# Altium PCB For_Atmega328P.PcbDoc
Units mm, origin at the board's own origin, x right, y up, seen from the top; angles counter-clockwise.
Board outline 18 x 44 mm, 2 copper layers (Top Layer, Bottom Layer); 16 components, 14 nets, 42 pads, 7 vias.
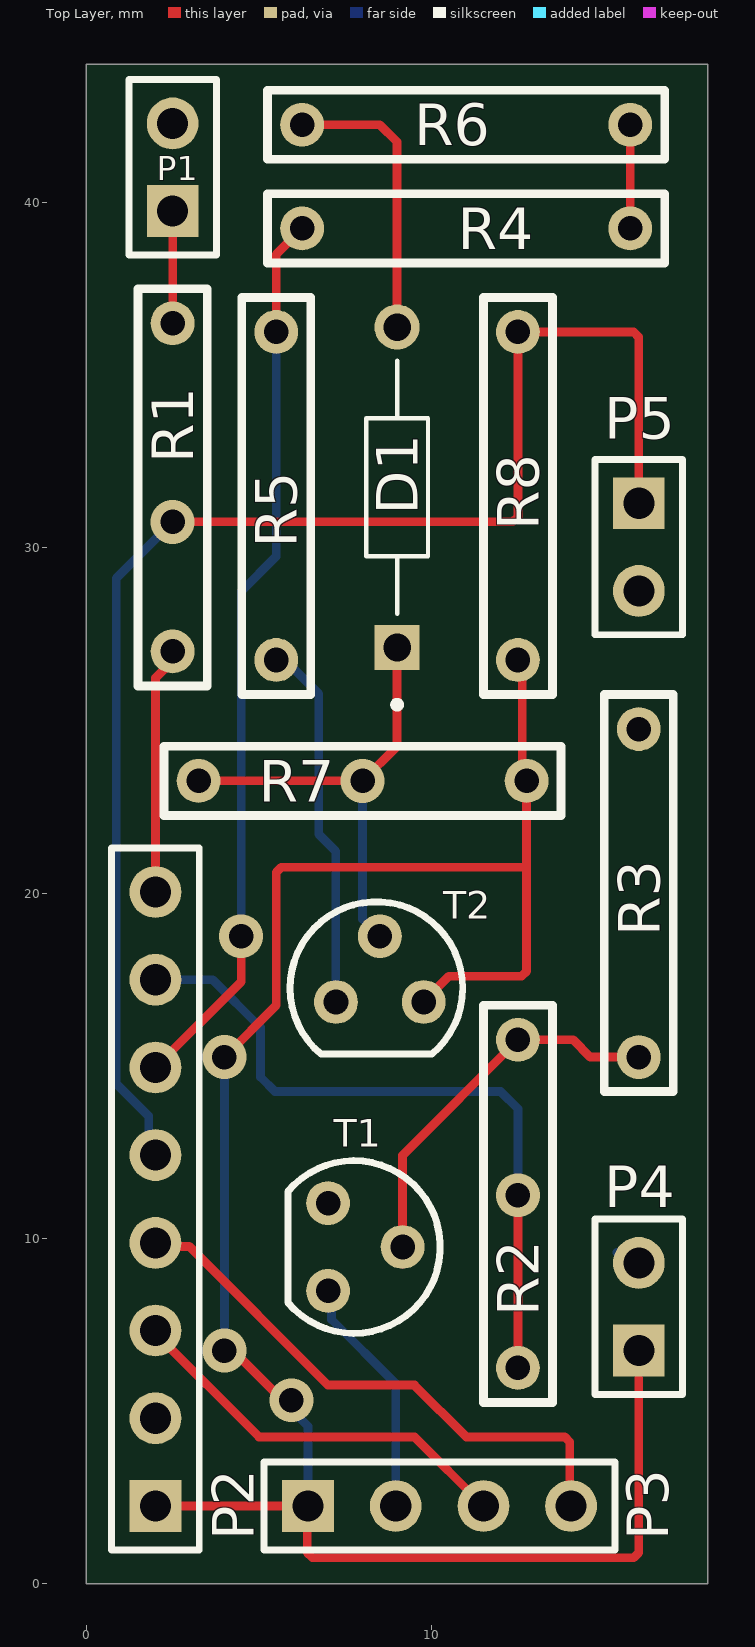
[diagram p0: Top Layer view]
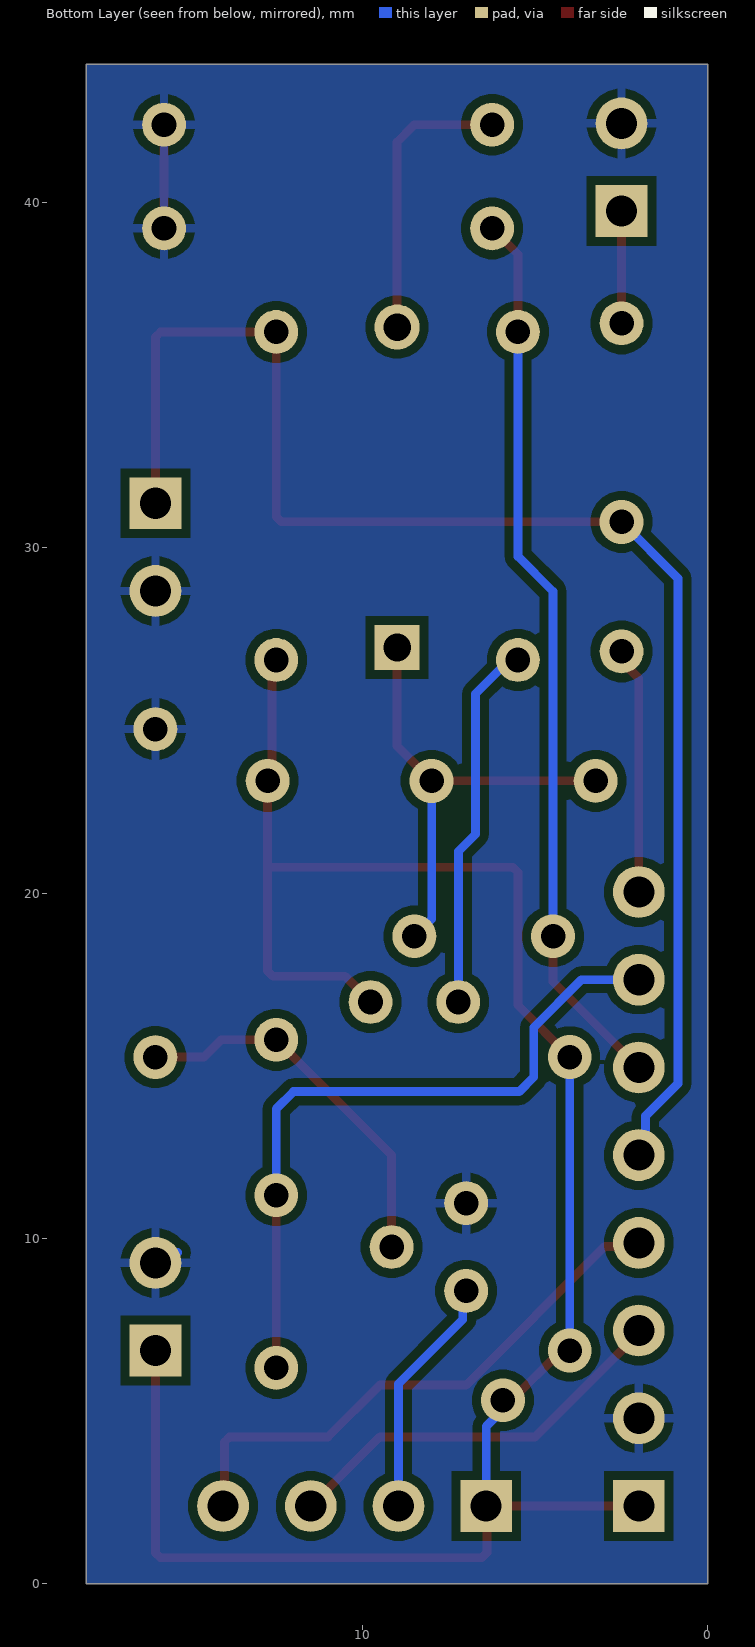
[diagram p1: Bottom Layer view, seen from below]

## Layer stack, top to bottom
Top Solder: solder mask 0.0102, Solder Resist, Dk 3.5
Top Layer: signal copper 0.0356
Dielectric 1: dielectric 0.32, FR-4, Dk 4.8
Bottom Layer: signal copper 0.0356
Bottom Solder: solder mask 0.0102, Solder Resist, Dk 3.5

## Board outline
0,0 0,44 18,44 18,0

## Design rules (kind name [scope] priority, off if disabled: settings)
Clearance [All] p1: gap=0.254 ignorepadtopadclearanceinfootprint=FALSE except(0: Arc-Hole Track-Hole SMDPad-Hole THPad-Hole Via-Hole Fill-Hole Poly-Hole Region-Hole Text-Hole)
PolygonConnect [All] p1: connectstyle=Relief reliefconductorwidth=0.254 reliefentries=4 polygonreliefangle="90 Angle" airgapwidth=0.254
RoutingVias [All] p1: holewidth=0.711 width=1.27 viastyle="Through Hole" minholewidth=0.711 minwidth=1.27 maxholewidth=0.711 maxwidth=1.27
SolderMaskExpansion [All] p1: expansion=0.102 istentingtop=FALSE
Width [All] p1: maxlimit=0.254 minlimit=0.254 preferedwidth=0.254
30 further rules are at their usual default settings.

## Classes and differential pairs
component class ForAtmega328P: P1 P2 P3 P5 R1 R2 R3 R4 R5 R6 R7 R8 T1

## Components (designator, comment, footprint, x,y, rotation, side; value= is the part's Value field where it differs from the comment)
D1 "BZX55C3V9_R0G" DIOAD928W47L399D179 9,31.75 r90 top
P1 "LED" HDR1X2 2.5,39.75 r90 top
P2 "ToMC" HDR1X8 2,2.25 r90 top
P3 "BLUEZ" HDR1X4 6.42,2.25 r0 top
P4 "POWER" HDR1X2 16,6.75 r90 top
P5 "SENSOR" HDR1X2 16,31.29 r270 top
R1 "2.4k" Res 2.5,31.75 r270 top
R2 "3k" Res 12.5,11 r90 top
R3 "10k" Res 16,20 r90 top
R4 "82k" Res 11,39.25 r0 top
R5 "10k" Res 5.5,31.5 r270 top
R6 "62k" Res 11,42.25 r180 top
R7 "20k" Res 8,23.25 r0 top
R8 "10k" Res 12.5,31.5 r90 top
T1 "BC547" TO92 7,9.75 r90 top
T2 "BC557" SOT54A 8.5,16.845 r0 top (schematic designator Q1)

## Footprints (in the part's own frame and the unit in brackets; to place one, negate y for a bottom-side part, rotate by r counter-clockwise, add the part's x,y. Pads: shape width x height; smd on the part's side, far side on the other; paste and mask are expansions set on the pad)
DIOAD928W47L399D179 [mm]
  round 1.308 hole 0.8: A(4.64,0)
  rect 1.308x1.308 / inner round 1.308 / far side rect 1.308x1.308 hole 0.8: C(-4.64,0)
  silkscreen extent -6.39,-0.89 3.67,0.89, body extent -4.87,-1.14 4.87,1.14, height 2.28
HDR1X2 [mm] "Connector; Header; 2 Position"
  rect 1.5x1.5 hole 0.9: 1(0,0)
  round 1.5 hole 0.9: 2(2.54,0)
  silkscreen extent -1.27,-1.27 3.81,1.27
HDR1X4 [mm] "Connector; Header; 4 Position"
  rect 1.5x1.5 hole 0.9: 1(0,0)
  round 1.5 hole 0.9: 2(2.54,0) 3(5.08,0) 4(7.62,0)
  silkscreen extent -1.27,-1.27 8.89,1.27
HDR1X8 [mm] "Connector; Header; 8 Position"
  rect 1.5x1.5 hole 0.9: 1(0,0)
  round 1.5 hole 0.9: 2(2.54,0) 3(5.08,0) 4(7.62,0) 5(10.16,0) 6(12.7,0) 7(15.24,0) 8(17.78,0)
  silkscreen extent -1.27,-1.27 19.05,1.27
Res [mm]
  round 1.27 hole 0.711: 1(-4.75,0) 2(4.75,0)
  silkscreen extent -5.75,-1 5.75,1
SOT54A [mm]
  round 1.27 hole 0.711: B(0,1.905) C(-1.27,0) E(1.27,0)
  silkscreen extent -2.6,-1.51 2.4,2.9
TO92 [mil]
  round 50 hole 27.99: 1(50,0) 2(0,-85) 3(-50,0)

## Part data
D1: Package=None, Availability=Unavailable, MP=altium_native_batch, Price=None
P1 P4 P5: library part "Header 2", "Header, 2-Pin", LatestRevisionDate=17-Jul-2002, LatestRevisionNote="Re-released for DXP Platform.", Publisher="Altium Limited"
P2: library part "Header 8", "Header, 8-Pin", LatestRevisionDate=17-Jul-2002, LatestRevisionNote="Re-released for DXP Platform.", Publisher="Altium Limited"
P3: library part "Header 4", "Header, 4-Pin", LatestRevisionDate=17-Jul-2002, LatestRevisionNote="Re-released for DXP Platform.", Publisher="Altium Limited"
R1 R2 R3 R4 R5 R6 R7 R8: library part Res
T1: "Trans GP BJT NPN 45V 0.1A 500mW 3-Pin TO-92 T/R", Package=None, Availability="In Stock", Check_prices=https://www.snapeda.com/parts/BC547/Onsemi/view-part/?ref=eda, MF="ON Semiconductor", MP=BC547, Price=None, Purchase-URL=https://pricing.snapeda.com/search/part/BC547/?ref=eda, SnapEDA_Link=https://www.snapeda.com/parts/BC547/Onsemi/view-part/?ref=snap
T2: "Bipolar (BJT) Transistor PNP 45 V 100 mA 320MHz 625 mW Through Hole TO-92 (TO-226)", Package="E-PKG AXIAL-LEADED-2 ON Semiconductor", Availability="In Stock", Check_prices=https://www.snapeda.com/parts/BC557/Onsemi/view-part/?ref=eda, MF="ON Semiconductor", MP=BC557, Price=None, Purchase-URL=https://pricing.snapeda.com/search/part/BC557/?ref=eda, SnapEDA_Link=https://www.snapeda.com/parts/BC557/Onsemi/view-part/?ref=snap

## Via types
v1: diameter 1.27, hole 0.711, Top Layer to Bottom Layer, 7 vias

## Nets (pads, with @x,y where several pads share a name; then routed paths per layer and width w, separated by ;. In a path a pad name is that pad's centre, name@x,y a point inside that pad or via, vN(x,y) a via of type N, cw(c..) or ccw(c..) an arc to the next point about the centre after c; other vN are vias at no path point)
GND: P1.2 P2.2 P4.2 P5.2 R3.2 R4.2 R6.1 T1.1 | length 3.8
  Top Layer w0.254: R4.2 R6.1
  Bottom Layer w0.254: P4.2@15.363,9.59 15.424,9.528 15.762,9.528 P4.2
NetD1_A: D1.A R6.2 | length 8.3
  Top Layer w0.254: R6.2 8.5,42.25 9,41.75 D1.A
NetD1_C: D1.C R7.1 T2.B | length 13.7
  Top Layer w0.254: R7.1 v1(8,23.25) 9,24.25 D1.C
  Bottom Layer w0.254: v1(8,23.25) 8,19.25 T2.B
NetP1_1: P1.1 R1.1 | length 3.3
  Top Layer w0.254: R1.1 P1.1
NetP2_3: P2.3 P3.3 | length 11.7
  Top Layer w0.254: P2.3 2,7.25 5,4.25 9.5,4.25 P3.3
NetP2_4: P2.4 P3.4 | length 16.3
  Top Layer w0.254: P2.4 2.102,9.768 2.982,9.768 7,5.75 9.5,5.75 11,4.25 13.851,4.25 14,4.101 14,2.29 P3.4
NetP2_5: P2.5 P5.1 R8.2 | length 43.3
  Top Layer w0.254: v1(2.5,30.75) 12.351,30.75 12.5,30.899 R8.2 15.851,36.25 16,36.101 P5.1
  Bottom Layer w0.254: P2.5 1.81,12.6 1.81,13.541 0.869,14.482 0.869,29.119 v1(2.5,30.75)
NetP2_6: P2.6 R4.1 R5.1 | length 26.1
  Top Layer w0.254: P2.6 4.484,17.434 v1(4.484,18.75) ; R5.1 5.5,38.5 R4.1
  Bottom Layer w0.254: v1(4.484,18.75) 4.484,28.734 5.5,29.75 R5.1
NetP2_7: P2.7 R2.1 | length 20.4
  Top Layer w0.254: R2.1 v1(12.5,11.25)
  Bottom Layer w0.254: P2.7 3.586,17.49 3.664,17.49 5.045,16.109 5.045,14.672 5.467,14.25 12,14.25 12.5,13.75 v1(12.5,11.25)
NetP2_8: P2.8 R1.2 | length 7.2
  Top Layer w0.254: P2.8 2,26.225 2.5,26.725 R1.2
NetP3_2: P3.2 T1.3 | length 7
  Bottom Layer w0.254: T1.3 7.099,8.381 7.099,7.651 8.96,5.79 P3.2
NetQ1_C: R5.2 T2.C | length 10.9
  Bottom Layer w0.254: R5.2@5.5,27 6.73,25.77 6.73,21.702 7.222,21.21 7.222,16.853 T2.C
NetR2_2: R2.2 R3.1 T1.2 | length 11.6
  Top Layer w0.254: T1.2@9.159,9.25 9.159,12.409 R2.2 14.097,15.75 14.597,15.25 R3.1
VCC: P2.1 P3.1 P4.1 R7.2 R8.1 T2.E | length 59.1
  Top Layer w0.254: P2.1 P3.1@5.75,2.25 ; v1(4,6.75) 4.25,6.75 5.687,5.313 v1(5.937,5.313) ; v1(4,15.25) 5.5,16.75 5.5,20.601 5.649,20.75 12.75,20.75 ; 6.4,1.45 6.4,0.899 6.549,0.75 15.851,0.75 16,0.899 16,5.95 ; T2.E 9.77,16.858 10.5,17.588 12.601,17.588 12.75,17.737 12.75,20.75 ; R8.1 12.625,26.625 12.625,23.375 R7.2 12.75,20.75
  Bottom Layer w0.254: v1(4,6.75) v1(4,15.25) ; v1(5.937,5.313) 5.937,5.038 6.42,4.555 P3.1
copper on no net: | length 1.9
  Top Layer w0.254: 6.42,2.25 7,1.67 ; 15.5,6.25 16,6.75 15.75,6.5

## Polygon pours and split planes (outlines as drawn)
GND on Bottom Layer "GND_L02_P000" (solid, pour order 0): 0,0 0,44 18,44 18,0

## Silkscreen, mask and mechanical layers (free items; w line width, h text height)
Top Overlay:
  lines w0.2: 6.793,15.335 10.007,15.335 ; 5.835,8.143 ccw(c7.75,9.75) 5.835,11.357 5.835,8.143
Mechanical 1:
  the board outline again, w0.254